# EAGLE board Qwiic_Scale-Panel (EAGLE 9.3.0)
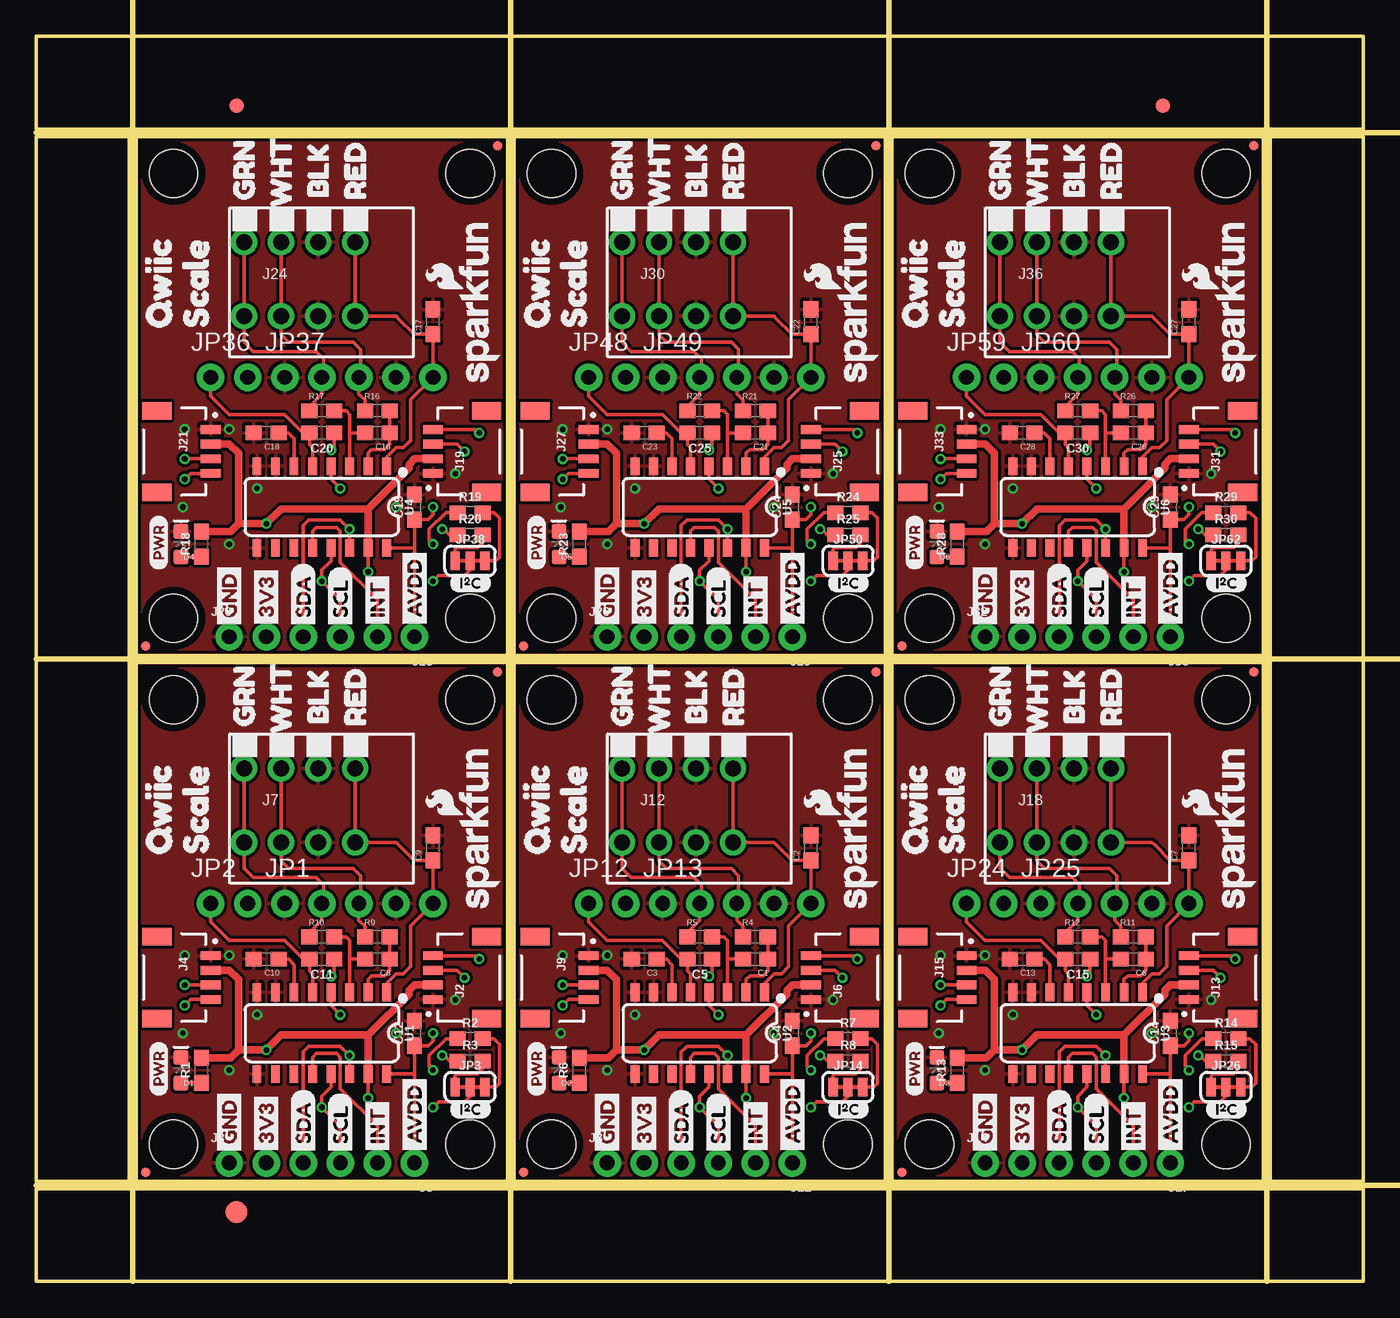
[diagram p0: board, top side]
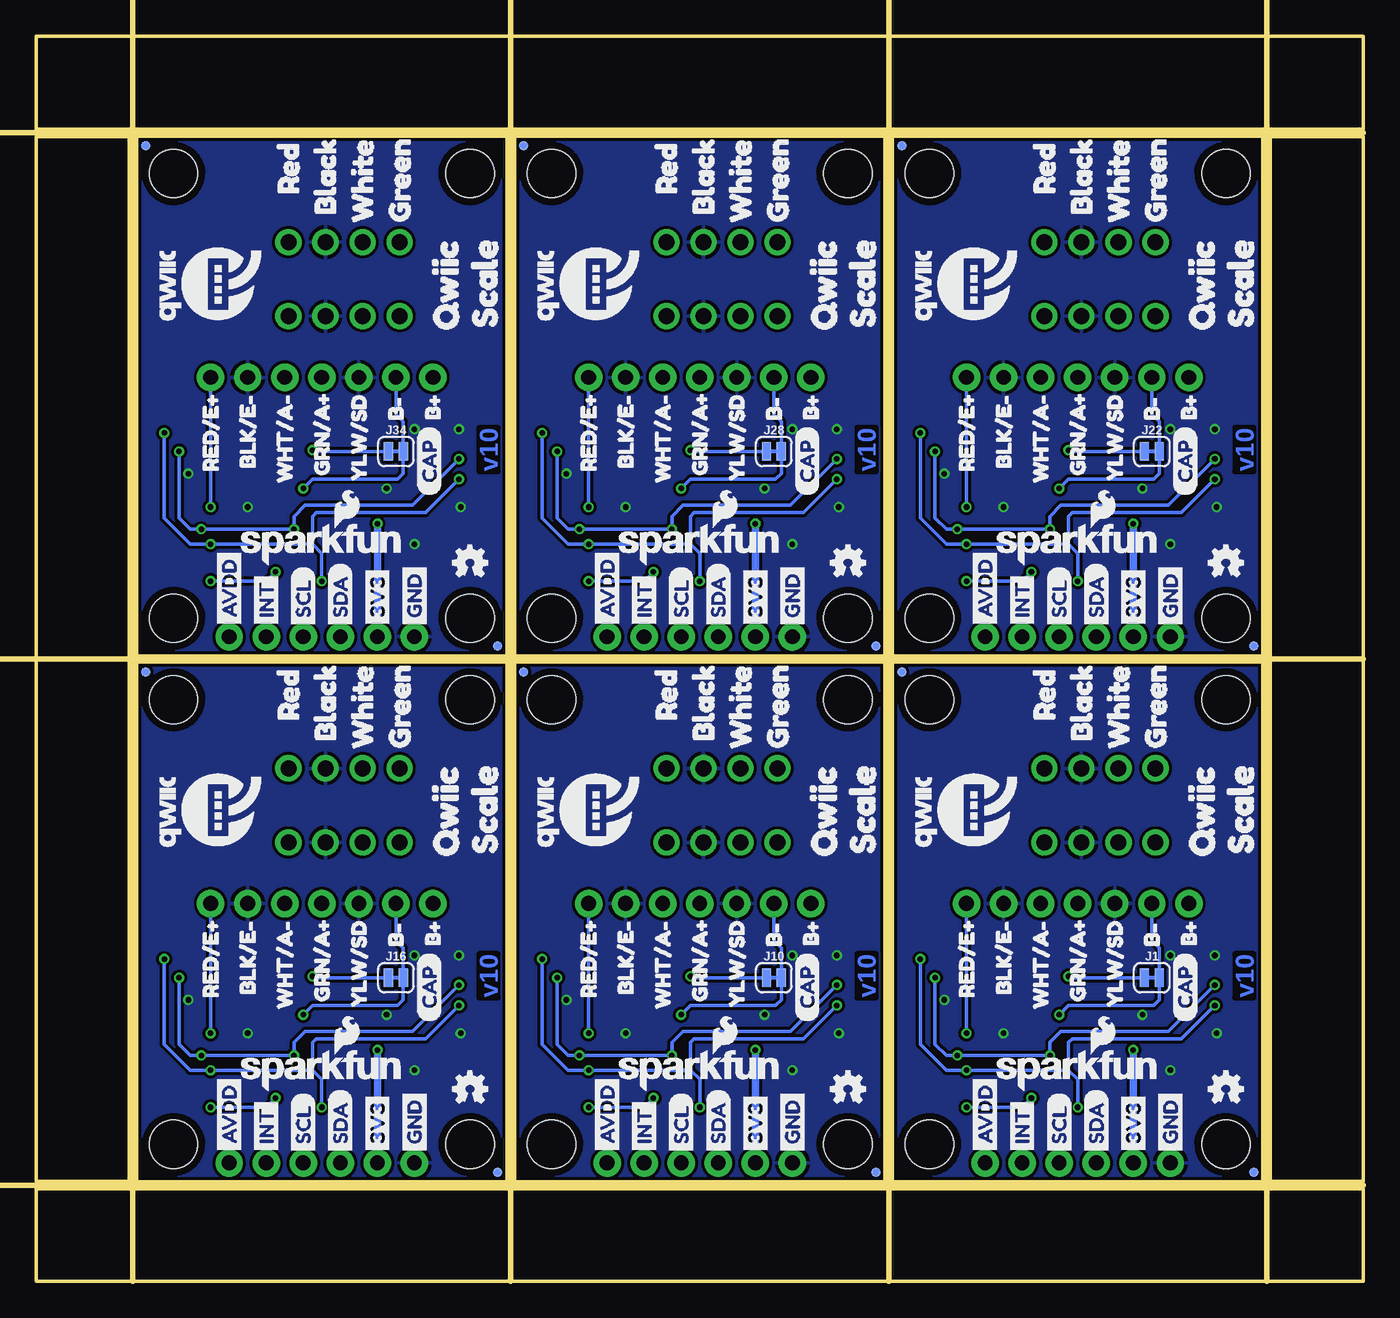
[diagram p1: board, bottom side, seen from below]

Size 90.93 x 85.34 mm. Coordinates in mm from the lower left corner, seen from the top.
Outline: 32.26,6.86 6.86,6.86 6.86,42.42 32.26,42.42 32.26,6.86
Outline: 58.17,6.86 32.77,6.86 32.77,42.42 58.17,42.42 58.17,6.86
Outline: 84.07,6.86 58.67,6.86 58.67,42.42 84.07,42.42 84.07,6.86
Outline: 32.26,42.93 6.86,42.93 6.86,78.49 32.26,78.49 32.26,42.93
Outline: 58.17,42.93 32.77,42.93 32.77,78.49 58.17,78.49 58.17,42.93
Outline: 84.07,42.93 58.67,42.93 58.67,78.49 84.07,78.49 84.07,42.93
Outline: 0,6.35 90.93,6.35 90.93,0 0,0 0,6.35
Outline: 84.58,78.49 90.93,78.49 90.93,6.86 84.58,6.86 84.58,78.49
Outline: 0,85.34 90.93,85.34 90.93,78.99 0,78.99 0,85.34
Outline: 0,78.49 6.35,78.49 6.35,6.86 0,6.86 0,78.49
Copper layers (1*16): Top 0.035mm / dielectric 1.5mm / Bottom 0.035mm
Design rules "SparkFun-2-layer-PCBWay-LIMIT": minimum track width 6mil, minimum drill 0.3mm, track to track 6mil, track to pad 6mil, pad to pad 6mil, via to via 6mil, smd to smd 6mil, copper to edge 6mil, drill to drill 6mil, minimum pad ring 6mil, minimum via ring 6mil, stop-mask expansion 4mil, vias tented up to drill 25mil, thermal gap 10mil
Net classes: 2 3.3V: width 0.508 mm
Milling: 7 lines

## Footprints (pad centres in the part's own frame; a part is rotated, then mirrored left to right if it is on the bottom)
0603 = smd 1.1 x 1: 1 -0.85,0; 2 0.85,0
LED-0603 = smd 1 x 1: A -0.877,0; C 0.877,0
FIDUCIAL-1X2 = smd 1 x 1: 1 0,0
FIDUCIAL-1.5X3 = smd 1.5 x 1.5: 1 0,0
SMT-JUMPER_2_NC_TRACE_SILK = smd 0.635 x 1.27: 1 -0.508,0; 2 0.508,0
JST04_1MM_RA = smd 0.6 x 1.35: 1 -1.5,0; 2 -0.5,0; 3 0.5,0; 4 1.5,0 | smd 1.2 x 2: NC1 2.8,-3.675; NC2 -2.8,-3.675
1X04_NO_SILK = drill 1.016 pad 1.88: 1 0,0; 2 2.54,0; 3 5.08,0; 4 7.62,0
1X02_NO_SILK = drill 1.016 pad 1.88: 1 0,0; 2 2.54,0
1X04_SPRING_TERMINAL = drill 1.1 pad 1.8: 1 7.62,2.54; 2 5.08,2.54; 3 2.54,2.54; 4 0,2.54; 5 7.62,-2.54; 6 5.08,-2.54; 7 2.54,-2.54; 8 0,-2.54
1X05_NO_SILK = drill 1.016 pad 1.88: 1 0,0; 2 2.54,0; 3 5.08,0; 4 7.62,0; 5 10.16,0
SMT-JUMPER_3_2-NC_TRACE_SILK = smd 0.635 x 1.27: 1 -1.016,0; 2 0,0; 3 1.016,0
STAND-OFF = hole 3.302: 0,0
MICRO-FIDUCIAL = smd 0.635 x 0.635: 1 0,0
SO16 = smd 0.6 x 1.2: 1 -4.445,-2.8; 2 -3.175,-2.8; 3 -1.905,-2.8; 4 -0.635,-2.8; 5 0.635,-2.8; 6 1.905,-2.8; 7 3.175,-2.8; 8 4.445,-2.8; 9 4.445,2.8; 10 3.175,2.8; 11 1.905,2.8; 12 0.635,2.8; 13 -0.635,2.8; 14 -1.905,2.8; 15 -3.175,2.8; 16 -4.445,2.8

## Placement (x,y rotation side)
C1  0.1uF  [0603]  49.28,22.1 180 top
C2  0.1uF  [0603]  53.09,29.72 90 top
C3  0.1uF  [0603]  41.66,22.1 180 top
C4  1.0uF  [0603]  51.82,17.02 90 top
C5  330pF  [0603]  45.47,22.1 180 top
C6  0.1uF  [0603]  75.18,22.1 180 top
C7  0.1uF  [0603]  78.99,29.72 90 top
C8  0.1uF  [0603]  23.37,22.1 180 top
C9  0.1uF  [0603]  27.18,29.72 90 top
C10  0.1uF  [0603]  15.75,22.1 180 top
C11  330pF  [0603]  19.56,22.1 180 top
C12  1.0uF  [0603]  25.91,17.02 90 top
C13  0.1uF  [0603]  67.56,22.1 180 top
C14  1.0uF  [0603]  77.72,17.02 90 top
C15  330pF  [0603]  71.37,22.1 180 top
C16  0.1uF  [0603]  23.37,58.17 180 top
C17  0.1uF  [0603]  27.18,65.79 90 top
C18  0.1uF  [0603]  15.75,58.17 180 top
C19  1.0uF  [0603]  25.91,53.09 90 top
C20  330pF  [0603]  19.56,58.17 180 top
C21  0.1uF  [0603]  49.28,58.17 180 top
C22  0.1uF  [0603]  53.09,65.79 90 top
C23  0.1uF  [0603]  41.66,58.17 180 top
C24  1.0uF  [0603]  51.82,53.09 90 top
C25  330pF  [0603]  45.47,58.17 180 top
C26  0.1uF  [0603]  75.18,58.17 180 top
C27  0.1uF  [0603]  78.99,65.79 90 top
C28  0.1uF  [0603]  67.56,58.17 180 top
C29  1.0uF  [0603]  77.72,53.09 90 top
C30  330pF  [0603]  71.37,58.17 180 top
D1  RED  [LED-0603]  9.91,14.48 90 top
D2  RED  [LED-0603]  35.81,14.48 90 top
D3  RED  [LED-0603]  61.72,14.48 90 top
D4  RED  [LED-0603]  9.91,50.55 90 top
D5  RED  [LED-0603]  35.81,50.55 90 top
D6  RED  [LED-0603]  61.72,50.55 90 top
E$1  [FIDUCIAL-1X2]  13.72,80.58 0 top
E$2  [FIDUCIAL-1X2]  77.22,80.58 0 top
E$3  [FIDUCIAL-1.5X3]  13.72,4.76 0 top
J1  CAP  [SMT-JUMPER_2_NC_TRACE_SILK]  14.48,20.83 0 bottom
J2  Qwiic Right Angle  [JST04_1MM_RA]  27.18,20.83 90 top
J3  PTH  [1X04_NO_SILK]  13.21,8.13 0 top
J4  Qwiic Right Angle  [JST04_1MM_RA]  11.94,20.83 270 top
J5  [1X02_NO_SILK]  25.91,8.13 180 top
J6  Qwiic Right Angle  [JST04_1MM_RA]  53.09,20.83 90 top
J7  Spring Terminal  [1X04_SPRING_TERMINAL]  14.22,32.64 0 top
J8  PTH  [1X04_NO_SILK]  39.12,8.13 0 top
J9  Qwiic Right Angle  [JST04_1MM_RA]  37.85,20.83 270 top
J10  CAP  [SMT-JUMPER_2_NC_TRACE_SILK]  40.39,20.83 0 bottom
J11  [1X02_NO_SILK]  51.82,8.13 180 top
J12  Spring Terminal  [1X04_SPRING_TERMINAL]  40.13,32.64 0 top
J13  Qwiic Right Angle  [JST04_1MM_RA]  78.99,20.83 90 top
J14  PTH  [1X04_NO_SILK]  65.02,8.13 0 top
J15  Qwiic Right Angle  [JST04_1MM_RA]  63.75,20.83 270 top
J16  CAP  [SMT-JUMPER_2_NC_TRACE_SILK]  66.29,20.83 0 bottom
J17  [1X02_NO_SILK]  77.72,8.13 180 top
J18  Spring Terminal  [1X04_SPRING_TERMINAL]  66.04,32.64 0 top
J19  Qwiic Right Angle  [JST04_1MM_RA]  27.18,56.9 90 top
J20  PTH  [1X04_NO_SILK]  13.21,44.2 0 top
J21  Qwiic Right Angle  [JST04_1MM_RA]  11.94,56.9 270 top
J22  CAP  [SMT-JUMPER_2_NC_TRACE_SILK]  14.48,56.9 0 bottom
J23  [1X02_NO_SILK]  25.91,44.2 180 top
J24  Spring Terminal  [1X04_SPRING_TERMINAL]  14.22,68.71 0 top
J25  Qwiic Right Angle  [JST04_1MM_RA]  53.09,56.9 90 top
J26  PTH  [1X04_NO_SILK]  39.12,44.2 0 top
J27  Qwiic Right Angle  [JST04_1MM_RA]  37.85,56.9 270 top
J28  CAP  [SMT-JUMPER_2_NC_TRACE_SILK]  40.39,56.9 0 bottom
J29  [1X02_NO_SILK]  51.82,44.2 180 top
J30  Spring Terminal  [1X04_SPRING_TERMINAL]  40.13,68.71 0 top
J31  Qwiic Right Angle  [JST04_1MM_RA]  78.99,56.9 90 top
J32  PTH  [1X04_NO_SILK]  65.02,44.2 0 top
J33  Qwiic Right Angle  [JST04_1MM_RA]  63.75,56.9 270 top
J34  CAP  [SMT-JUMPER_2_NC_TRACE_SILK]  66.29,56.9 0 bottom
J35  [1X02_NO_SILK]  77.72,44.2 180 top
J36  Spring Terminal  [1X04_SPRING_TERMINAL]  66.04,68.71 0 top
JP1  [1X05_NO_SILK]  17.02,25.91 0 top
JP2  [1X02_NO_SILK]  11.94,25.91 0 top
JP3  I2C  [SMT-JUMPER_3_2-NC_TRACE_SILK]  29.72,13.34 0 top
JP4  STAND-OFF  [STAND-OFF]  35.31,9.4 90 top
JP5  STAND-OFF  [STAND-OFF]  35.31,39.88 90 top
JP6  FIDUCIALUFIDUCIAL  [MICRO-FIDUCIAL]  57.53,41.78 90 top
JP7  FIDUCIALUFIDUCIAL  [MICRO-FIDUCIAL]  33.4,7.49 90 top
JP8  FIDUCIALUFIDUCIAL  [MICRO-FIDUCIAL]  57.53,41.78 270 bottom
JP9  FIDUCIALUFIDUCIAL  [MICRO-FIDUCIAL]  33.4,7.49 270 bottom
JP10  STAND-OFF  [STAND-OFF]  55.63,9.4 90 top
JP11  STAND-OFF  [STAND-OFF]  55.63,39.88 90 top
JP12  [1X02_NO_SILK]  37.85,25.91 0 top
JP13  [1X05_NO_SILK]  42.93,25.91 0 top
JP14  I2C  [SMT-JUMPER_3_2-NC_TRACE_SILK]  55.63,13.34 0 top
JP15  STAND-OFF  [STAND-OFF]  61.21,9.4 90 top
JP16  STAND-OFF  [STAND-OFF]  61.21,39.88 90 top
JP17  FIDUCIALUFIDUCIAL  [MICRO-FIDUCIAL]  83.44,41.78 90 top
JP18  FIDUCIALUFIDUCIAL  [MICRO-FIDUCIAL]  59.31,7.49 90 top
JP19  FIDUCIALUFIDUCIAL  [MICRO-FIDUCIAL]  83.44,41.78 270 bottom
JP20  FIDUCIALUFIDUCIAL  [MICRO-FIDUCIAL]  59.31,7.49 270 bottom
JP21  FIDUCIALUFIDUCIAL  [MICRO-FIDUCIAL]  31.62,41.78 90 top
JP22  STAND-OFF  [STAND-OFF]  81.53,9.4 90 top
JP23  STAND-OFF  [STAND-OFF]  81.53,39.88 90 top
JP24  [1X02_NO_SILK]  63.75,25.91 0 top
JP25  [1X05_NO_SILK]  68.83,25.91 0 top
JP26  I2C  [SMT-JUMPER_3_2-NC_TRACE_SILK]  81.53,13.34 0 top
JP27  STAND-OFF  [STAND-OFF]  9.4,45.47 90 top
JP28  STAND-OFF  [STAND-OFF]  9.4,75.95 90 top
JP29  FIDUCIALUFIDUCIAL  [MICRO-FIDUCIAL]  31.62,77.85 90 top
JP30  FIDUCIALUFIDUCIAL  [MICRO-FIDUCIAL]  7.49,43.56 90 top
JP31  STAND-OFF  [STAND-OFF]  9.4,9.4 90 top
JP32  FIDUCIALUFIDUCIAL  [MICRO-FIDUCIAL]  31.62,77.85 270 bottom
JP33  FIDUCIALUFIDUCIAL  [MICRO-FIDUCIAL]  7.49,43.56 270 bottom
JP34  STAND-OFF  [STAND-OFF]  29.72,45.47 90 top
JP35  STAND-OFF  [STAND-OFF]  29.72,75.95 90 top
JP36  [1X02_NO_SILK]  11.94,61.98 0 top
JP37  [1X05_NO_SILK]  17.02,61.98 0 top
JP38  I2C  [SMT-JUMPER_3_2-NC_TRACE_SILK]  29.72,49.4 0 top
JP39  STAND-OFF  [STAND-OFF]  35.31,45.47 90 top
JP40  STAND-OFF  [STAND-OFF]  35.31,75.95 90 top
JP41  STAND-OFF  [STAND-OFF]  9.4,39.88 90 top
JP42  FIDUCIALUFIDUCIAL  [MICRO-FIDUCIAL]  57.53,77.85 90 top
JP43  FIDUCIALUFIDUCIAL  [MICRO-FIDUCIAL]  33.4,43.56 90 top
JP44  FIDUCIALUFIDUCIAL  [MICRO-FIDUCIAL]  57.53,77.85 270 bottom
JP45  FIDUCIALUFIDUCIAL  [MICRO-FIDUCIAL]  33.4,43.56 270 bottom
JP46  STAND-OFF  [STAND-OFF]  55.63,45.47 90 top
JP47  STAND-OFF  [STAND-OFF]  55.63,75.95 90 top
JP48  [1X02_NO_SILK]  37.85,61.98 0 top
JP49  [1X05_NO_SILK]  42.93,61.98 0 top
JP50  I2C  [SMT-JUMPER_3_2-NC_TRACE_SILK]  55.63,49.4 0 top
JP51  STAND-OFF  [STAND-OFF]  61.21,45.47 90 top
JP52  STAND-OFF  [STAND-OFF]  61.21,75.95 90 top
JP53  FIDUCIALUFIDUCIAL  [MICRO-FIDUCIAL]  83.44,77.85 90 top
JP54  FIDUCIALUFIDUCIAL  [MICRO-FIDUCIAL]  59.31,43.56 90 top
JP55  FIDUCIALUFIDUCIAL  [MICRO-FIDUCIAL]  83.44,77.85 270 bottom
JP56  FIDUCIALUFIDUCIAL  [MICRO-FIDUCIAL]  59.31,43.56 270 bottom
JP57  STAND-OFF  [STAND-OFF]  81.53,45.47 90 top
JP58  STAND-OFF  [STAND-OFF]  81.53,75.95 90 top
JP59  [1X02_NO_SILK]  63.75,61.98 0 top
JP60  [1X05_NO_SILK]  68.83,61.98 0 top
JP61  FIDUCIALUFIDUCIAL  [MICRO-FIDUCIAL]  7.49,7.49 90 top
JP62  I2C  [SMT-JUMPER_3_2-NC_TRACE_SILK]  81.53,49.4 0 top
JP71  FIDUCIALUFIDUCIAL  [MICRO-FIDUCIAL]  31.62,41.78 270 bottom
JP81  FIDUCIALUFIDUCIAL  [MICRO-FIDUCIAL]  7.49,7.49 270 bottom
JP91  STAND-OFF  [STAND-OFF]  29.72,9.4 90 top
JP101  STAND-OFF  [STAND-OFF]  29.72,39.88 90 top
LOGO1  OSHW-LOGOMINI  [OSHW-LOGO-MINI]  9.4,13.21 0 bottom
LOGO2  SFE_LOGO_NAME_FLAME.1_INCH  [SFE_LOGO_NAME_FLAME_.1]  19.56,14.48 0 bottom
LOGO3  SFE_LOGO_NAME_FLAME.1_INCH  [SFE_LOGO_NAME_FLAME_.1]  30.35,31.12 90 top
LOGO4  OSHW-LOGOMINI  [OSHW-LOGO-MINI]  35.31,13.21 0 bottom
LOGO5  SFE_LOGO_NAME_FLAME.1_INCH  [SFE_LOGO_NAME_FLAME_.1]  45.47,14.48 0 bottom
LOGO6  SFE_LOGO_NAME_FLAME.1_INCH  [SFE_LOGO_NAME_FLAME_.1]  56.26,31.12 90 top
LOGO7  OSHW-LOGOMINI  [OSHW-LOGO-MINI]  61.21,13.21 0 bottom
LOGO8  SFE_LOGO_NAME_FLAME.1_INCH  [SFE_LOGO_NAME_FLAME_.1]  71.37,14.48 0 bottom
LOGO9  SFE_LOGO_NAME_FLAME.1_INCH  [SFE_LOGO_NAME_FLAME_.1]  82.17,31.12 90 top
LOGO10  OSHW-LOGOMINI  [OSHW-LOGO-MINI]  9.4,49.28 0 bottom
LOGO11  SFE_LOGO_NAME_FLAME.1_INCH  [SFE_LOGO_NAME_FLAME_.1]  19.56,50.55 0 bottom
LOGO12  SFE_LOGO_NAME_FLAME.1_INCH  [SFE_LOGO_NAME_FLAME_.1]  30.35,67.18 90 top
LOGO13  OSHW-LOGOMINI  [OSHW-LOGO-MINI]  35.31,49.28 0 bottom
LOGO14  SFE_LOGO_NAME_FLAME.1_INCH  [SFE_LOGO_NAME_FLAME_.1]  45.47,50.55 0 bottom
LOGO15  SFE_LOGO_NAME_FLAME.1_INCH  [SFE_LOGO_NAME_FLAME_.1]  56.26,67.18 90 top
LOGO16  OSHW-LOGOMINI  [OSHW-LOGO-MINI]  61.21,49.28 0 bottom
LOGO17  SFE_LOGO_NAME_FLAME.1_INCH  [SFE_LOGO_NAME_FLAME_.1]  71.37,50.55 0 bottom
LOGO18  SFE_LOGO_NAME_FLAME.1_INCH  [SFE_LOGO_NAME_FLAME_.1]  82.17,67.18 90 top
R1  1k  [0603]  11.3,14.48 90 top
R2  2.2k  [0603]  29.72,16.64 0 top
R3  2.2k  [0603]  29.72,15.11 0 top
R4  47  [0603]  49.28,23.62 0 top
R5  47  [0603]  45.47,23.62 0 top
R6  1k  [0603]  37.21,14.48 90 top
R7  2.2k  [0603]  55.63,16.64 0 top
R8  2.2k  [0603]  55.63,15.11 0 top
R9  47  [0603]  23.37,23.62 0 top
R10  47  [0603]  19.56,23.62 0 top
R11  47  [0603]  75.18,23.62 0 top
R12  47  [0603]  71.37,23.62 0 top
R13  1k  [0603]  63.12,14.48 90 top
R14  2.2k  [0603]  81.53,16.64 0 top
R15  2.2k  [0603]  81.53,15.11 0 top
R16  47  [0603]  23.37,59.69 0 top
R17  47  [0603]  19.56,59.69 0 top
R18  1k  [0603]  11.3,50.55 90 top
R19  2.2k  [0603]  29.72,52.7 0 top
R20  2.2k  [0603]  29.72,51.18 0 top
R21  47  [0603]  49.28,59.69 0 top
R22  47  [0603]  45.47,59.69 0 top
R23  1k  [0603]  37.21,50.55 90 top
R24  2.2k  [0603]  55.63,52.7 0 top
R25  2.2k  [0603]  55.63,51.18 0 top
R26  47  [0603]  75.18,59.69 0 top
R27  47  [0603]  71.37,59.69 0 top
R28  1k  [0603]  63.12,50.55 90 top
R29  2.2k  [0603]  81.53,52.7 0 top
R30  2.2k  [0603]  81.53,51.18 0 top
U1  NAU7802  [SO16]  19.56,17.02 180 top
U2  NAU7802  [SO16]  45.47,17.02 180 top
U3  NAU7802  [SO16]  71.37,17.02 180 top
U4  NAU7802  [SO16]  19.56,53.09 180 top
U5  NAU7802  [SO16]  45.47,53.09 180 top
U6  NAU7802  [SO16]  71.37,53.09 180 top
U$1  [SDA-[)]  18.29,8.51 90 top
U$2  [SDA-[)]  44.2,8.51 90 top
U$3  [SCL-[)]  20.83,8.51 90 top
U$4  [SDA-[)]  18.29,8.51 90 bottom
U$5  [SCL-[)]  20.83,8.51 90 bottom
U$6  [3V3-04]  15.75,8.51 90 top
U$7  [3V3-04]  15.75,8.51 90 bottom
U$8  [GND-04]  13.21,8.51 90 top
U$9  [GND-04]  13.21,8.51 90 bottom
U$10  [SCL-[)]  46.74,8.51 90 top
U$11  [YLW#SD4]  17.02,17.91 90 bottom
U$12  [B#11]  14.48,22.1 90 bottom
U$13  [B#12]  11.94,22.1 90 bottom
U$14  [SDA-[)]  44.2,8.51 90 bottom
U$15  [INT8]  23.37,8.51 90 top
U$16  [INT8]  23.37,8.51 90 bottom
U$17  [QWIIC2]  11.05,27.69 90 bottom
U$18  [PWR-()-03]  8.38,12.7 90 top
U$19  [I_SUPER2_C-()-03]  28.32,11.81 0 top
U$20  [CAP0]  12.19,17.78 90 bottom
U$21  [SCL-[)]  46.74,8.51 90 bottom
U$22  [QWIIC2]  8.38,27.81 90 top
U$23  [3V3-04]  41.66,8.51 90 top
U$24  [SCALE3]  10.92,27.81 90 top
U$25  [SCALE3]  8.38,27.81 90 bottom
U$26  [3V3-04]  41.66,8.51 90 bottom
U$27  [GND-04]  39.12,8.51 90 top
U$28  [GND-04]  39.12,8.51 90 bottom
U$29  [INT8]  49.28,8.51 90 top
U$30  [QWIIC-LOGO-MEDIUM]  27.18,32.26 90 bottom
U$31  [INT8]  49.28,8.51 90 bottom
U$32  [QWIIC-LOGO-MEDIUM]  53.09,32.26 90 bottom
U$33  [PWR-()-03]  34.29,12.7 90 top
U$34  [BLK#E#1]  24.64,18.8 90 bottom
U$35  [GRN#A#4]  19.56,18.29 90 bottom
U$36  [AVDD4]  25.91,8.51 90 top
U$37  [BLACK5]  19.3,35.81 90 bottom
U$38  [BLK1]  19.3,36.96 90 top
U$39  [GREEN7]  14.22,35.31 90 bottom
U$40  [GRN3]  14.22,36.83 90 top
U$41  [RED0]  21.84,36.83 90 top
U$42  [RED4]  21.84,37.21 90 bottom
U$43  [WHITE6]  16.76,35.05 90 bottom
U$44  [WHT2]  16.76,36.32 90 top
U$45  [AVDD4]  25.91,8.51 90 bottom
U$46  [RED#E#2]  27.18,18.54 90 bottom
U$47  [B#11]  40.39,22.1 90 bottom
U$48  [WHT#A#3]  22.1,17.78 90 bottom
U$49  [B#12]  37.85,22.1 90 bottom
U$50  [BLACK5]  45.21,35.81 90 bottom
U$51  [BLK1]  45.21,36.96 90 top
U$52  [GREEN7]  40.13,35.31 90 bottom
U$53  [GRN3]  40.13,36.83 90 top
U$54  [RED0]  47.75,36.83 90 top
U$55  [RED4]  47.75,37.21 90 bottom
U$56  [WHITE6]  42.67,35.05 90 bottom
U$57  [WHT2]  42.67,36.32 90 top
U$58  [BLK#E#1]  50.55,18.8 90 bottom
U$59  [GRN#A#4]  45.47,18.29 90 bottom
U$60  [RED#E#2]  53.09,18.54 90 bottom
U$61  [WHT#A#3]  48.01,17.78 90 bottom
U$62  [YLW#SD4]  42.93,17.91 90 bottom
U$63  [AVDD4]  51.82,8.51 90 top
U$64  [AVDD4]  51.82,8.51 90 bottom
U$65  [QWIIC2]  34.29,27.81 90 top
U$66  [SCALE3]  36.83,27.81 90 top
U$67  [QWIIC2]  36.96,27.69 90 bottom
U$68  [SCALE3]  34.29,27.81 90 bottom
U$69  [I_SUPER2_C-()-03]  54.23,11.81 0 top
U$70  [CAP0]  38.1,17.78 90 bottom
U$71  [SDA-[)]  70.1,8.51 90 top
U$72  [SCL-[)]  72.64,8.51 90 top
U$73  [SDA-[)]  70.1,8.51 90 bottom
U$74  [SCL-[)]  72.64,8.51 90 bottom
U$75  [3V3-04]  67.56,8.51 90 top
U$76  [3V3-04]  67.56,8.51 90 bottom
U$77  [GND-04]  65.02,8.51 90 top
U$78  [GND-04]  65.02,8.51 90 bottom
U$79  [INT8]  75.18,8.51 90 top
U$80  [INT8]  75.18,8.51 90 bottom
U$81  [QWIIC-LOGO-MEDIUM]  78.99,32.26 90 bottom
U$82  [PWR-()-03]  60.2,12.7 90 top
U$83  [B#11]  66.29,22.1 90 bottom
U$84  [B#12]  63.75,22.1 90 bottom
U$85  [BLACK5]  71.12,35.81 90 bottom
U$86  [BLK1]  71.12,36.96 90 top
U$87  [GREEN7]  66.04,35.31 90 bottom
U$88  [GRN3]  66.04,36.83 90 top
U$89  [RED0]  73.66,36.83 90 top
U$90  [RED4]  73.66,37.21 90 bottom
U$91  [WHITE6]  68.58,35.05 90 bottom
U$92  [WHT2]  68.58,36.32 90 top
U$93  [BLK#E#1]  76.45,18.8 90 bottom
U$94  [GRN#A#4]  71.37,18.29 90 bottom
U$95  [RED#E#2]  78.99,18.54 90 bottom
U$96  [WHT#A#3]  73.91,17.78 90 bottom
U$97  [YLW#SD4]  68.83,17.91 90 bottom
U$98  [AVDD4]  77.72,8.51 90 top
U$99  [AVDD4]  77.72,8.51 90 bottom
U$100  [QWIIC2]  60.2,27.81 90 top
U$101  [SCALE3]  62.74,27.81 90 top
U$102  [QWIIC2]  62.86,27.69 90 bottom
U$103  [SCALE3]  60.2,27.81 90 bottom
U$104  [I_SUPER2_C-()-03]  80.14,11.81 0 top
U$105  [CAP0]  64.01,17.78 90 bottom
U$106  [SDA-[)]  18.29,44.58 90 top
U$107  [SCL-[)]  20.83,44.58 90 top
U$108  [SDA-[)]  18.29,44.58 90 bottom
U$109  [SCL-[)]  20.83,44.58 90 bottom
U$110  [3V3-04]  15.75,44.58 90 top
U$111  [3V3-04]  15.75,44.58 90 bottom
U$112  [GND-04]  13.21,44.58 90 top
U$113  [GND-04]  13.21,44.58 90 bottom
U$114  [INT8]  23.37,44.58 90 top
U$115  [INT8]  23.37,44.58 90 bottom
U$116  [QWIIC-LOGO-MEDIUM]  27.18,68.33 90 bottom
U$117  [PWR-()-03]  8.38,48.77 90 top
U$118  [B#11]  14.48,58.17 90 bottom
U$119  [B#12]  11.94,58.17 90 bottom
U$120  [BLACK5]  19.3,71.88 90 bottom
U$121  [BLK1]  19.3,73.03 90 top
U$122  [GREEN7]  14.22,71.37 90 bottom
U$123  [GRN3]  14.22,72.9 90 top
U$124  [RED0]  21.84,72.9 90 top
U$125  [RED4]  21.84,73.28 90 bottom
U$126  [WHITE6]  16.76,71.12 90 bottom
U$127  [WHT2]  16.76,72.39 90 top
U$128  [BLK#E#1]  24.64,54.86 90 bottom
U$129  [GRN#A#4]  19.56,54.36 90 bottom
U$130  [RED#E#2]  27.18,54.61 90 bottom
U$131  [WHT#A#3]  22.1,53.85 90 bottom
U$132  [YLW#SD4]  17.02,53.97 90 bottom
U$133  [AVDD4]  25.91,44.58 90 top
U$134  [AVDD4]  25.91,44.58 90 bottom
U$135  [QWIIC2]  8.38,63.88 90 top
U$136  [SCALE3]  10.92,63.88 90 top
U$137  [QWIIC2]  11.05,63.75 90 bottom
U$138  [SCALE3]  8.38,63.88 90 bottom
U$139  [I_SUPER2_C-()-03]  28.32,47.88 0 top
U$140  [CAP0]  12.19,53.85 90 bottom
U$141  [SDA-[)]  44.2,44.58 90 top
U$142  [SCL-[)]  46.74,44.58 90 top
U$143  [SDA-[)]  44.2,44.58 90 bottom
U$144  [SCL-[)]  46.74,44.58 90 bottom
U$145  [3V3-04]  41.66,44.58 90 top
U$146  [3V3-04]  41.66,44.58 90 bottom
U$147  [GND-04]  39.12,44.58 90 top
U$148  [GND-04]  39.12,44.58 90 bottom
U$149  [INT8]  49.28,44.58 90 top
U$150  [INT8]  49.28,44.58 90 bottom
U$151  [QWIIC-LOGO-MEDIUM]  53.09,68.33 90 bottom
U$152  [PWR-()-03]  34.29,48.77 90 top
U$153  [B#11]  40.39,58.17 90 bottom
U$154  [B#12]  37.85,58.17 90 bottom
U$155  [BLACK5]  45.21,71.88 90 bottom
U$156  [BLK1]  45.21,73.03 90 top
U$157  [GREEN7]  40.13,71.37 90 bottom
U$158  [GRN3]  40.13,72.9 90 top
U$159  [RED0]  47.75,72.9 90 top
U$160  [RED4]  47.75,73.28 90 bottom
U$161  [WHITE6]  42.67,71.12 90 bottom
U$162  [WHT2]  42.67,72.39 90 top
U$163  [BLK#E#1]  50.55,54.86 90 bottom
U$164  [GRN#A#4]  45.47,54.36 90 bottom
U$165  [RED#E#2]  53.09,54.61 90 bottom
U$166  [WHT#A#3]  48.01,53.85 90 bottom
U$167  [YLW#SD4]  42.93,53.97 90 bottom
U$168  [AVDD4]  51.82,44.58 90 top
U$169  [AVDD4]  51.82,44.58 90 bottom
U$170  [QWIIC2]  34.29,63.88 90 top
U$171  [SCALE3]  36.83,63.88 90 top
U$172  [QWIIC2]  36.96,63.75 90 bottom
U$173  [SCALE3]  34.29,63.88 90 bottom
U$174  [I_SUPER2_C-()-03]  54.23,47.88 0 top
U$175  [CAP0]  38.1,53.85 90 bottom
U$176  [SDA-[)]  70.1,44.58 90 top
U$177  [SCL-[)]  72.64,44.58 90 top
U$178  [SDA-[)]  70.1,44.58 90 bottom
U$179  [SCL-[)]  72.64,44.58 90 bottom
U$180  [3V3-04]  67.56,44.58 90 top
U$181  [3V3-04]  67.56,44.58 90 bottom
U$182  [GND-04]  65.02,44.58 90 top
U$183  [GND-04]  65.02,44.58 90 bottom
U$184  [INT8]  75.18,44.58 90 top
U$185  [INT8]  75.18,44.58 90 bottom
U$186  [QWIIC-LOGO-MEDIUM]  78.99,68.33 90 bottom
U$187  [PWR-()-03]  60.2,48.77 90 top
U$188  [B#11]  66.29,58.17 90 bottom
U$189  [B#12]  63.75,58.17 90 bottom
U$190  [BLACK5]  71.12,71.88 90 bottom
U$191  [BLK1]  71.12,73.03 90 top
U$192  [GREEN7]  66.04,71.37 90 bottom
U$193  [GRN3]  66.04,72.9 90 top
U$194  [RED0]  73.66,72.9 90 top
U$195  [RED4]  73.66,73.28 90 bottom
U$196  [WHITE6]  68.58,71.12 90 bottom
U$197  [WHT2]  68.58,72.39 90 top
U$198  [BLK#E#1]  76.45,54.86 90 bottom
U$199  [GRN#A#4]  71.37,54.36 90 bottom
U$200  [RED#E#2]  78.99,54.61 90 bottom
U$201  [WHT#A#3]  73.91,53.85 90 bottom
U$202  [YLW#SD4]  68.83,53.97 90 bottom
U$203  [AVDD4]  77.72,44.58 90 top
U$204  [AVDD4]  77.72,44.58 90 bottom
U$205  [QWIIC2]  60.2,63.88 90 top
U$206  [SCALE3]  62.74,63.88 90 top
U$207  [QWIIC2]  62.86,63.75 90 bottom
U$208  [SCALE3]  60.2,63.88 90 bottom
U$209  [I_SUPER2_C-()-03]  80.14,47.88 0 top
U$210  [CAP0]  64.01,53.85 90 bottom

## Library data of the parts
C1-C3 C6-C10 C13 C16-C18 C21-C23 C26-C28 = SparkFun-Capacitors; PROD_ID: CAP-00810
C4 C12 C14 C19 C24 C29 = SparkFun-Capacitors; PROD_ID: CAP-00868
C5 C11 C15 C20 C25 C30 = SparkFun-Capacitors; PROD_ID: CAP-10108
D1-D6 = SparkFun-LED; PROD_ID: DIO-00819
E$1 E$2 LOGO1-LOGO18 = SparkFun-Aesthetics
E$3 = SparkFun-Retired
J1 J10 J16 J22 J28 J34 JP3 JP14 JP26 JP38 JP50 JP62 = SparkFun-Jumpers
J2 J4 J6 J9 J13 J15 J19 J21 J25 J27 J31 J33 = SparkFun-Connectors; PROD_ID: CONN-13694
J3 J5 J8 J11 J14 J17 J20 J23 J26 J29 J32 J35 JP1 JP2 JP12 JP13 JP24 JP25 JP36 JP37 JP48 JP49 JP59 JP60 = SparkFun-Connectors
J7 J12 J18 J24 J30 J36 = SparkFun-Connectors; SF_ID: PRT-08075
JP4-JP11 JP15-JP23 JP27-JP35 JP39-JP47 JP51-JP58 JP61 JP71 JP81 JP91 JP101 = SparkFun
R1 R6 R13 R18 R23 R28 = SparkFun-Resistors; PROD_ID: RES-07856
R2 R3 R7 R8 R14 R15 R19 R20 R24 R25 R29 R30 = SparkFun-Resistors; PROD_ID: RES-08272
R4 R5 R9-R12 R16 R17 R21 R22 R26 R27 = SparkFun-Resistors; PROD_ID: RES-14282
U1-U6 = SparkFun-IC-Conversion; PROD_ID: IC-14299
U$1-U$10 U$14 U$18 U$19 U$21 U$23 U$26-U$28 U$30 U$32 U$33 U$69 U$71-U$78 U$81 U$82 U$104 U$106-U$113 U$116 U$117 U$139 U$141-U$148 U$151 U$152 U$174 U$176-U$183 U$186 U$187 U$209 = Labels
U$11 U$62 U$97 U$132 U$167 U$202 = buzzard_labels (66)
U$12 U$13 U$47 U$49 U$83 U$84 U$118 U$119 U$153 U$154 U$188 U$189 = buzzard_labels (62)
U$15 U$16 U$29 U$31 U$79 U$80 U$114 U$115 U$149 U$150 U$184 U$185 = buzzard_labels (5)
U$17 U$22 U$24 U$25 U$65-U$68 U$100-U$103 U$135-U$138 U$170-U$173 U$205-U$208 = buzzard_labels (68)
U$20 U$70 U$105 U$140 U$175 U$210 = buzzard_labels (15)
U$34 U$35 U$46 U$48 U$58-U$61 U$93-U$96 U$128-U$131 U$163-U$166 U$198-U$201 = buzzard_labels (65)
U$36 U$45 U$63 U$64 U$98 U$99 U$133 U$134 U$168 U$169 U$203 U$204 = buzzard_labels (67)
U$37-U$44 U$50-U$57 U$85-U$92 U$120-U$127 U$155-U$162 U$190-U$197 = buzzard_labels (64)

## Nets
3.3V [3.3V]: J2.2 J3.2 J4.2 JP3.2 R1.2 U1.15
3.3V1 [3.3V]: J6.2 J8.2 J9.2 JP14.2 R6.2 U2.15
3.3V2 [3.3V]: J13.2 J14.2 J15.2 JP26.2 R13.2 U3.15
3.3V3 [3.3V]: J19.2 J20.2 J21.2 JP38.2 R18.2 U4.15
3.3V4 [3.3V]: J25.2 J26.2 J27.2 JP50.2 R23.2 U5.15
3.3V5 [3.3V]: J31.2 J32.2 J33.2 JP62.2 R28.2 U6.15
A+: J7.4 J7.8 JP1.2 R10.1
A+1: J12.4 J12.8 JP13.2 R5.1
A+2: J18.4 J18.8 JP25.2 R12.1
A+3: J24.4 J24.8 JP37.2 R17.1
A+4: J30.4 J30.8 JP49.2 R22.1
A+5: J36.4 J36.8 JP60.2 R27.1
A-: J7.3 J7.7 JP1.3 R9.1
A-1: J12.3 J12.7 JP13.3 R4.1
A-2: J18.3 J18.7 JP25.3 R11.1
A-3: J24.3 J24.7 JP37.3 R16.1
A-4: J30.3 J30.7 JP49.3 R21.1
A-5: J36.3 J36.7 JP60.3 R26.1
B+: C11.2 JP2.1 U1.5
B+1: C5.2 JP12.1 U2.5
B+2: C15.2 JP24.1 U3.5
B+3: C20.2 JP36.1 U4.5
B+4: C25.2 JP48.1 U5.5
B+5: C30.2 JP59.1 U6.5
B-: J1.2 JP2.2 U1.4
B-1: J10.2 JP12.2 U2.4
B-2: J16.2 JP24.2 U3.4
B-3: J22.2 JP36.2 U4.4
B-4: J28.2 JP48.2 U5.4
B-5: J34.2 JP59.2 U6.4
GND: C9.2 C10.2 C12.2 D1.C J2.1 J3.1 J4.1 J7.2 J7.6 JP1.1 JP1.4 U1.7 U1.8 U1.9
GND1: C2.2 C3.2 C4.2 D2.C J6.1 J8.1 J9.1 J12.2 J12.6 JP13.1 JP13.4 U2.7 U2.8 U2.9
GND2: C7.2 C13.2 C14.2 D3.C J13.1 J14.1 J15.1 J18.2 J18.6 JP25.1 JP25.4 U3.7 U3.8 U3.9
GND3: C17.2 C18.2 C19.2 D4.C J19.1 J20.1 J21.1 J24.2 J24.6 JP37.1 JP37.4 U4.7 U4.8 U4.9
GND4: C22.2 C23.2 C24.2 D5.C J25.1 J26.1 J27.1 J30.2 J30.6 JP49.1 JP49.4 U5.7 U5.8 U5.9
GND5: C27.2 C28.2 C29.2 D6.C J31.1 J32.1 J33.1 J36.2 J36.6 JP60.1 JP60.4 U6.7 U6.8 U6.9
INT: J5.2 U1.12
INT1: J11.2 U2.12
INT2: J17.2 U3.12
INT3: J23.2 U4.12
INT4: J29.2 U5.12
INT5: J35.2 U6.12
N$1: C11.1 J1.1
N$2: JP3.1 R3.2
N$3: JP3.3 R2.2
N$4: D2.A R6.1
N$5: C3.1 U2.6
N$6: C1.2 R5.2 U2.3
N$7: C1.1 R4.2 U2.2
N$8: C5.1 J10.1
N$9: JP14.1 R8.2
N$10: D1.A R1.1
N$11: C10.1 U1.6
N$12: JP14.3 R7.2
N$13: D3.A R13.1
N$14: C13.1 U3.6
N$15: C8.2 R10.2 U1.3
N$16: C8.1 R9.2 U1.2
N$17: C6.2 R12.2 U3.3
N$18: C6.1 R11.2 U3.2
N$19: C15.1 J16.1
N$20: JP26.1 R15.2
N$21: JP26.3 R14.2
N$22: D4.A R18.1
N$23: C18.1 U4.6
N$24: C16.2 R17.2 U4.3
N$25: C16.1 R16.2 U4.2
N$26: C20.1 J22.1
N$27: JP38.1 R20.2
N$28: JP38.3 R19.2
N$29: D5.A R23.1
N$30: C23.1 U5.6
N$31: C21.2 R22.2 U5.3
N$32: C21.1 R21.2 U5.2
N$33: C25.1 J28.1
N$34: JP50.1 R25.2
N$35: JP50.3 R24.2
N$36: D6.A R28.1
N$37: C28.1 U6.6
N$38: C26.2 R27.2 U6.3
N$39: C26.1 R26.2 U6.2
N$40: C30.1 J34.1
N$41: JP62.1 R30.2
N$42: JP62.3 R29.2
SCL: J2.4 J3.4 J4.4 R2.1 U1.13
SCL1: J6.4 J8.4 J9.4 R7.1 U2.13
SCL2: J13.4 J14.4 J15.4 R14.1 U3.13
SCL3: J19.4 J20.4 J21.4 R19.1 U4.13
SCL4: J25.4 J26.4 J27.4 R24.1 U5.13
SCL5: J31.4 J32.4 J33.4 R29.1 U6.13
SDA: J2.3 J3.3 J4.3 R3.1 U1.14
SDA1: J6.3 J8.3 J9.3 R8.1 U2.14
SDA2: J13.3 J14.3 J15.3 R15.1 U3.14
SDA3: J19.3 J20.3 J21.3 R20.1 U4.14
SDA4: J25.3 J26.3 J27.3 R25.1 U5.14
SDA5: J31.3 J32.3 J33.3 R30.1 U6.14
VDDA: C9.1 C12.1 J5.1 J7.1 J7.5 JP1.5 U1.1 U1.16
VDDA1: C2.1 C4.1 J11.1 J12.1 J12.5 JP13.5 U2.1 U2.16
VDDA2: C7.1 C14.1 J17.1 J18.1 J18.5 JP25.5 U3.1 U3.16
VDDA3: C17.1 C19.1 J23.1 J24.1 J24.5 JP37.5 U4.1 U4.16
VDDA4: C22.1 C24.1 J29.1 J30.1 J30.5 JP49.5 U5.1 U5.16
VDDA5: C27.1 C29.1 J35.1 J36.1 J36.5 JP60.5 U6.1 U6.16

## Tracks (layer width: path | path; a pad name or v marks a point on that pad's centre or on a via)
3.3V  (via drill 0.38)
  Top 0.254: JP3.2 29.72,12.7 29.34,12.32 27.56,12.32 v27.18,11.94 | v22.73,12.57 U1.15
  Top 0.508: 13.84,15.88 13.84,20.7 13.22,21.33 J4.2 | J2.2 25.92,20.33 25.53,19.94 25.53,19.68 22.73,16.89 | 22.73,16.89 U1.15 | 13.84,15.88 v15.75,15.88 16.76,16.89 22.73,16.89 | 13.84,15.88 13.3,15.33 R1.2
  Bottom 0.254: v27.18,11.94 23.37,11.94 v22.73,12.57
  Bottom 0.508: v15.75,15.88 J3.2
3.3V1  (via drill 0.38)
  Top 0.254: JP14.2 55.63,12.7 55.24,12.32 53.47,12.32 v53.09,11.94 | v48.64,12.57 U2.15
  Top 0.508: 39.75,15.88 39.75,20.7 39.12,21.33 J9.2 | J6.2 51.82,20.33 51.43,19.94 51.43,19.68 48.64,16.89 | 48.64,16.89 U2.15 | 39.75,15.88 v41.66,15.88 42.67,16.89 48.64,16.89 | 39.75,15.88 39.2,15.33 R6.2
  Bottom 0.254: v53.09,11.94 49.28,11.94 v48.64,12.57
  Bottom 0.508: v41.66,15.88 J8.2
3.3V2  (via drill 0.38)
  Top 0.254: JP26.2 81.53,12.7 81.15,12.32 79.38,12.32 v78.99,11.94 | v74.55,12.57 U3.15
  Top 0.508: 65.66,15.88 65.66,20.7 65.03,21.33 J15.2 | J13.2 77.73,20.33 77.34,19.94 77.34,19.68 74.55,16.89 | 74.55,16.89 U3.15 | 65.66,15.88 v67.56,15.88 68.58,16.89 74.55,16.89 | 65.66,15.88 65.11,15.33 R13.2
  Bottom 0.254: v78.99,11.94 75.18,11.94 v74.55,12.57
  Bottom 0.508: v67.56,15.88 J14.2
3.3V3  (via drill 0.38)
  Top 0.254: JP38.2 29.72,48.77 29.34,48.39 27.56,48.39 v27.18,48.01 | v22.73,48.64 U4.15
  Top 0.508: 13.84,51.94 13.84,56.77 13.22,57.4 J21.2 | J19.2 25.92,56.4 25.53,56.01 25.53,55.75 22.73,52.96 | 22.73,52.96 U4.15 | 13.84,51.94 v15.75,51.94 16.76,52.96 22.73,52.96 | 13.84,51.94 13.3,51.4 R18.2
  Bottom 0.254: v27.18,48.01 23.37,48.01 v22.73,48.64
  Bottom 0.508: v15.75,51.94 J20.2
3.3V4  (via drill 0.38)
  Top 0.254: JP50.2 55.63,48.77 55.24,48.39 53.47,48.39 v53.09,48.01 | v48.64,48.64 U5.15
  Top 0.508: 39.75,51.94 39.75,56.77 39.12,57.4 J27.2 | J25.2 51.82,56.4 51.43,56.01 51.43,55.75 48.64,52.96 | 48.64,52.96 U5.15 | 39.75,51.94 v41.66,51.94 42.67,52.96 48.64,52.96 | 39.75,51.94 39.2,51.4 R23.2
  Bottom 0.254: v53.09,48.01 49.28,48.01 v48.64,48.64
  Bottom 0.508: v41.66,51.94 J26.2
3.3V5  (via drill 0.38)
  Top 0.254: JP62.2 81.53,48.77 81.15,48.39 79.38,48.39 v78.99,48.01 | v74.55,48.64 U6.15
  Top 0.508: 65.66,51.94 65.66,56.77 65.03,57.4 J33.2 | J31.2 77.73,56.4 77.34,56.01 77.34,55.75 74.55,52.96 | 74.55,52.96 U6.15 | 65.66,51.94 v67.56,51.94 68.58,52.96 74.55,52.96 | 65.66,51.94 65.11,51.4 R28.2
  Bottom 0.254: v78.99,48.01 75.18,48.01 v74.55,48.64
  Bottom 0.508: v67.56,51.94 J32.2
A+
  Top 0.254: R10.1 18.71,23.91 19.56,24.77 JP1.2 19.68,26.04 19.68,27.18 19.18,27.69 14.86,27.69 14.22,28.32 J7.8 J7.4
A+1
  Top 0.254: R5.1 44.62,23.91 45.47,24.77 JP13.2 45.59,26.04 45.59,27.18 45.08,27.69 40.77,27.69 40.13,28.32 J12.8 J12.4
A+2
  Top 0.254: R12.1 70.52,23.91 71.37,24.77 JP25.2 71.5,26.04 71.5,27.18 70.99,27.69 66.67,27.69 66.04,28.32 J18.8 J18.4
A+3
  Top 0.254: R17.1 18.71,59.98 19.56,60.83 JP37.2 19.68,62.1 19.68,63.25 19.18,63.75 14.86,63.75 14.22,64.39 J24.8 J24.4
A+4
  Top 0.254: R22.1 44.62,59.98 45.47,60.83 JP49.2 45.59,62.1 45.59,63.25 45.08,63.75 40.77,63.75 40.13,64.39 J30.8 J30.4
A+5
  Top 0.254: R27.1 70.52,59.98 71.37,60.83 JP60.2 71.5,62.1 71.5,63.25 70.99,63.75 66.67,63.75 66.04,64.39 J36.8 J36.4
A-
  Top 0.254: R9.1 22.52,24.34 22.1,24.77 JP1.3 22.23,26.04 22.23,27.81 21.72,28.32 17.27,28.32 16.76,28.83 J7.7 J7.3
A-1
  Top 0.254: R4.1 48.43,24.34 48.01,24.77 JP13.3 48.13,26.04 48.13,27.81 47.62,28.32 43.18,28.32 42.67,28.83 J12.7 J12.3
A-2
  Top 0.254: R11.1 74.33,24.34 73.91,24.77 JP25.3 74.04,26.04 74.04,27.81 73.53,28.32 69.09,28.32 68.58,28.83 J18.7 J18.3
A-3
  Top 0.254: R16.1 22.52,60.41 22.1,60.83 JP37.3 22.23,62.1 22.23,63.88 21.72,64.39 17.27,64.39 16.76,64.9 J24.7 J24.3
A-4
  Top 0.254: R21.1 48.43,60.41 48.01,60.83 JP49.3 48.13,62.1 48.13,63.88 47.62,64.39 43.18,64.39 42.67,64.9 J30.7 J30.3
A-5
  Top 0.254: R26.1 74.33,60.41 73.91,60.83 JP60.3 74.04,62.1 74.04,63.88 73.53,64.39 69.09,64.39 68.58,64.9 J36.7 J36.3
B+
  Top 0.254: U1.5 18.92,21.08 18.71,21.3 C11.2 18.29,22.1 17.02,23.37 13.21,23.37 11.94,24.64 JP2.1
B+1
  Top 0.254: U2.5 44.83,21.08 44.62,21.3 C5.2 44.2,22.1 42.93,23.37 39.12,23.37 37.85,24.64 JP12.1
B+2
  Top 0.254: U3.5 70.74,21.08 70.52,21.3 C15.2 70.1,22.1 68.83,23.37 65.02,23.37 63.75,24.64 JP24.1
B+3
  Top 0.254: U4.5 18.92,57.15 18.71,57.36 C20.2 18.29,58.17 17.02,59.44 13.21,59.44 11.94,60.71 JP36.1
B+4
  Top 0.254: U5.5 44.83,57.15 44.62,57.36 C25.2 44.2,58.17 42.93,59.44 39.12,59.44 37.85,60.71 JP48.1
B+5
  Top 0.254: U6.5 70.74,57.15 70.52,57.36 C30.2 70.1,58.17 68.83,59.44 65.02,59.44 63.75,60.71 JP59.1
B-  (via drill 0.38)
  Top 0.254: U1.4 20.19,18.92 v20.83,18.29
  Bottom 0.254: v20.83,18.29 20.19,18.92 14.35,18.92 13.97,19.3 J1.2 13.97,22.86 14.48,23.37 JP2.2
B-1  (via drill 0.38)
  Top 0.254: U2.4 46.1,18.92 v46.74,18.29
  Bottom 0.254: v46.74,18.29 46.1,18.92 40.26,18.92 39.88,19.3 J10.2 39.88,22.86 40.39,23.37 JP12.2
B-2  (via drill 0.38)
  Top 0.254: U3.4 72.01,18.92 v72.64,18.29
  Bottom 0.254: v72.64,18.29 72.01,18.92 66.17,18.92 65.79,19.3 J16.2 65.79,22.86 66.29,23.37 JP24.2
B-3  (via drill 0.38)
  Top 0.254: U4.4 20.19,54.99 v20.83,54.36
  Bottom 0.254: v20.83,54.36 20.19,54.99 14.35,54.99 13.97,55.37 J22.2 13.97,58.93 14.48,59.44 JP36.2
B-4  (via drill 0.38)
  Top 0.254: U5.4 46.1,54.99 v46.74,54.36
  Bottom 0.254: v46.74,54.36 46.1,54.99 40.26,54.99 39.88,55.37 J28.2 39.88,58.93 40.39,59.44 JP48.2
B-5  (via drill 0.38)
  Top 0.254: U6.4 72.01,54.99 v72.64,54.36
  Bottom 0.254: v72.64,54.36 72.01,54.99 66.17,54.99 65.79,55.37 J34.2 65.79,58.93 66.29,59.44 JP59.2
GND  (via drill 0.38)
  other vias: 24.64,17.02 13.21,14.48 10.03,17.02 10.16,22.35 28.7,19.3 13.21,22.35 15.11,18.29
  pour Top (isolate 0.203, rank 4): 6.86,6.86 6.86,42.42 32.26,42.42 32.26,6.86
  pour Bottom (isolate 0.203, rank 4): 6.86,6.86 6.86,42.42 32.26,42.42 32.26,6.86
GND1  (via drill 0.38)
  other vias: 50.55,17.02 39.12,14.48 35.94,17.02 36.07,22.35 54.61,19.3 39.12,22.35 41.02,18.29
  pour Top (isolate 0.203, rank 4): 32.77,6.86 32.77,42.42 58.17,42.42 58.17,6.86
  pour Bottom (isolate 0.203, rank 4): 32.77,6.86 32.77,42.42 58.17,42.42 58.17,6.86
GND2  (via drill 0.38)
  other vias: 76.45,17.02 65.02,14.48 61.85,17.02 61.98,22.35 80.52,19.3 65.02,22.35 66.93,18.29
  pour Top (isolate 0.203, rank 4): 58.67,6.86 58.67,42.42 84.07,42.42 84.07,6.86
  pour Bottom (isolate 0.203, rank 4): 58.67,6.86 58.67,42.42 84.07,42.42 84.07,6.86
GND3  (via drill 0.38)
  other vias: 24.64,53.09 13.21,50.55 10.03,53.09 10.16,58.42 28.7,55.37 13.21,58.42 15.11,54.36
  pour Top (isolate 0.203, rank 4): 6.86,42.93 6.86,78.49 32.26,78.49 32.26,42.93
  pour Bottom (isolate 0.203, rank 4): 6.86,42.93 6.86,78.49 32.26,78.49 32.26,42.93
GND4  (via drill 0.38)
  other vias: 50.55,53.09 39.12,50.55 35.94,53.09 36.07,58.42 54.61,55.37 39.12,58.42 41.02,54.36
  pour Top (isolate 0.203, rank 4): 32.77,42.93 32.77,78.49 58.17,78.49 58.17,42.93
  pour Bottom (isolate 0.203, rank 4): 32.77,42.93 32.77,78.49 58.17,78.49 58.17,42.93
GND5  (via drill 0.38)
  other vias: 76.45,53.09 65.02,50.55 61.85,53.09 61.98,58.42 80.52,55.37 65.02,58.42 66.93,54.36
  pour Top (isolate 0.203, rank 4): 58.67,42.93 58.67,78.49 84.07,78.49 84.07,42.93
  pour Bottom (isolate 0.203, rank 4): 58.67,42.93 58.67,78.49 84.07,78.49 84.07,42.93
INT
  Top 0.254: U1.12 18.92,15.37 19.18,15.62 20.57,15.62 20.83,15.37 20.83,13.21 23.37,10.67 J5.2
INT1
  Top 0.254: U2.12 44.83,15.37 45.08,15.62 46.48,15.62 46.74,15.37 46.74,13.21 49.28,10.67 J11.2
INT2
  Top 0.254: U3.12 70.74,15.37 70.99,15.62 72.39,15.62 72.64,15.37 72.64,13.21 75.18,10.67 J17.2
INT3
  Top 0.254: U4.12 18.92,51.43 19.18,51.69 20.57,51.69 20.83,51.43 20.83,49.28 23.37,46.74 J23.2
INT4
  Top 0.254: U5.12 44.83,51.43 45.08,51.69 46.48,51.69 46.74,51.43 46.74,49.28 49.28,46.74 J29.2
INT5
  Top 0.254: U6.12 70.74,51.43 70.99,51.69 72.39,51.69 72.64,51.43 72.64,49.28 75.18,46.74 J35.2
N$1  (via drill 0.38)
  Top 0.254: C11.1 20.41,21.13 v20.19,20.91
  Bottom 0.254: v20.19,20.91 20.11,20.83 J1.1
N$2
  Top 0.254: JP3.1 28.7,14.1 28.85,14.25 30.25,14.25 30.57,14.57 R3.2
N$3
  Top 0.254: JP3.3 31.5,13.34 31.75,13.59 31.75,16.26 31.37,16.64 R2.2
N$4
  Top 0.254: D2.A 37.18,13.6 R6.1
N$5
  Top 0.254: U2.6 43.56,21.72 43.18,22.1 C3.1
N$6
  Top 0.254: U2.3 47.37,22.1 | 47.37,22.1 47.37,23.37 47.12,23.62 R5.2 | C1.2 47.37,22.1
N$7
  Top 0.254: R4.2 C1.1 50.13,21.3 49.78,20.95 48.89,20.95 48.64,20.7 U2.2
N$8  (via drill 0.38)
  Top 0.254: C5.1 46.32,21.13 v46.1,20.91
  Bottom 0.254: v46.1,20.91 46.02,20.83 J10.1
N$9
  Top 0.254: JP14.1 54.61,14.1 54.76,14.25 56.16,14.25 56.48,14.57 R8.2
N$10
  Top 0.254: D1.A 11.28,13.6 R1.1
N$11
  Top 0.254: U1.6 17.65,21.72 17.27,22.1 C10.1
N$12
  Top 0.254: JP14.3 57.4,13.34 57.66,13.59 57.66,16.26 57.28,16.64 R7.2
N$13
  Top 0.254: D3.A 63.09,13.6 R13.1
N$14
  Top 0.254: U3.6 69.47,21.72 69.09,22.1 C13.1
N$15
  Top 0.254: U1.3 21.46,22.1 | 21.46,22.1 21.46,23.37 21.21,23.62 R10.2 | C8.2 21.46,22.1
N$16
  Top 0.254: R9.2 C8.1 24.22,21.3 23.88,20.95 22.99,20.95 22.73,20.7 U1.2
N$17
  Top 0.254: U3.3 73.28,22.1 | 73.28,22.1 73.28,23.37 73.03,23.62 R12.2 | C6.2 73.28,22.1
N$18
  Top 0.254: R11.2 C6.1 76.03,21.3 75.69,20.95 74.8,20.95 74.55,20.7 U3.2
N$19  (via drill 0.38)
  Top 0.254: C15.1 72.22,21.13 v72.01,20.91
  Bottom 0.254: v72.01,20.91 71.92,20.83 J16.1
N$20
  Top 0.254: JP26.1 80.52,14.1 80.67,14.25 82.07,14.25 82.38,14.57 R15.2
N$21
  Top 0.254: JP26.3 83.31,13.34 83.57,13.59 83.57,16.26 83.19,16.64 R14.2
N$22
  Top 0.254: D4.A 11.28,49.67 R18.1
N$23
  Top 0.254: U4.6 17.65,57.78 17.27,58.17 C18.1
N$24
  Top 0.254: U4.3 21.46,58.17 | 21.46,58.17 21.46,59.44 21.21,59.69 R17.2 | C16.2 21.46,58.17
N$25
  Top 0.254: R16.2 C16.1 24.22,57.36 23.88,57.02 22.99,57.02 22.73,56.77 U4.2
N$26  (via drill 0.38)
  Top 0.254: C20.1 20.41,57.2 v20.19,56.98
  Bottom 0.254: v20.19,56.98 20.11,56.9 J22.1
N$27
  Top 0.254: JP38.1 28.7,50.16 28.85,50.32 30.25,50.32 30.57,50.63 R20.2
N$28
  Top 0.254: JP38.3 31.5,49.4 31.75,49.66 31.75,52.32 31.37,52.7 R19.2
N$29
  Top 0.254: D5.A 37.18,49.67 R23.1
N$30
  Top 0.254: U5.6 43.56,57.78 43.18,58.17 C23.1
N$31
  Top 0.254: U5.3 47.37,58.17 | 47.37,58.17 47.37,59.44 47.12,59.69 R22.2 | C21.2 47.37,58.17
N$32
  Top 0.254: R21.2 C21.1 50.13,57.36 49.78,57.02 48.89,57.02 48.64,56.77 U5.2
N$33  (via drill 0.38)
  Top 0.254: C25.1 46.32,57.2 v46.1,56.98
  Bottom 0.254: v46.1,56.98 46.02,56.9 J28.1
N$34
  Top 0.254: JP50.1 54.61,50.16 54.76,50.32 56.16,50.32 56.48,50.63 R25.2
N$35
  Top 0.254: JP50.3 57.4,49.4 57.66,49.66 57.66,52.32 57.28,52.7 R24.2
N$36
  Top 0.254: D6.A 63.09,49.67 R28.1
N$37
  Top 0.254: U6.6 69.47,57.78 69.09,58.17 C28.1
N$38
  Top 0.254: U6.3 73.28,58.17 | 73.28,58.17 73.28,59.44 73.03,59.69 R27.2 | C26.2 73.28,58.17
N$39
  Top 0.254: R26.2 C26.1 76.03,57.36 75.69,57.02 74.8,57.02 74.55,56.77 U6.2
N$40  (via drill 0.38)
  Top 0.254: C30.1 72.22,57.2 v72.01,56.98
  Bottom 0.254: v72.01,56.98 71.92,56.9 J34.1
N$41
  Top 0.254: JP62.1 80.52,50.16 80.67,50.32 82.07,50.32 82.38,50.63 R30.2
N$42
  Top 0.254: JP62.3 83.31,49.4 83.57,49.66 83.57,52.32 83.19,52.7 R29.2
SCL  (via drill 0.38)
  Top 0.254: U1.13 20.19,13.33 19.56,12.69 v19.56,11.94 20.83,10.67 J3.4 | J2.4 30.12,22.33 v30.35,22.1 | J4.4 10.56,19.33 v10.16,18.92 | R2.1 28.07,16.64 26.92,15.49 26.92,14.73 v27.18,14.48
  Bottom 0.254: v30.35,22.1 30.35,16.26 28.57,14.48 v27.18,14.48 20.19,14.48 | v10.16,18.92 12.45,16.64 19.94,16.64 20.19,16.38 20.19,14.48 | 20.19,14.48 19.56,13.84 v19.56,11.94
SCL1  (via drill 0.38)
  Top 0.254: U2.13 46.1,13.33 45.47,12.69 v45.47,11.94 46.74,10.67 J8.4 | J6.4 56.03,22.33 v56.26,22.1 | J9.4 36.47,19.33 v36.07,18.92 | R7.1 53.97,16.64 52.83,15.49 52.83,14.73 v53.09,14.48
  Bottom 0.254: v56.26,22.1 56.26,16.26 54.48,14.48 v53.09,14.48 46.1,14.48 | v36.07,18.92 38.35,16.64 45.85,16.64 46.1,16.38 46.1,14.48 | 46.1,14.48 45.47,13.84 v45.47,11.94
SCL2  (via drill 0.38)
  Top 0.254: U3.13 72.01,13.33 71.37,12.69 v71.37,11.94 72.64,10.67 J14.4 | J13.4 81.94,22.33 v82.17,22.1 | J15.4 62.38,19.33 v61.98,18.92 | R14.1 79.88,16.64 78.74,15.49 78.74,14.73 v78.99,14.48
  Bottom 0.254: v82.17,22.1 82.17,16.26 80.39,14.48 v78.99,14.48 72.01,14.48 | v61.98,18.92 64.26,16.64 71.76,16.64 72.01,16.38 72.01,14.48 | 72.01,14.48 71.37,13.84 v71.37,11.94
SCL3  (via drill 0.38)
  Top 0.254: U4.13 20.19,49.4 19.56,48.76 v19.56,48.01 20.83,46.74 J20.4 | J19.4 30.12,58.4 v30.35,58.17 | J21.4 10.56,55.4 v10.16,54.99 | R19.1 28.07,52.7 26.92,51.56 26.92,50.8 v27.18,50.55
  Bottom 0.254: v30.35,58.17 30.35,52.32 28.57,50.55 v27.18,50.55 20.19,50.55 | v10.16,54.99 12.45,52.7 19.94,52.7 20.19,52.45 20.19,50.55 | 20.19,50.55 19.56,49.91 v19.56,48.01
SCL4  (via drill 0.38)
  Top 0.254: U5.13 46.1,49.4 45.47,48.76 v45.47,48.01 46.74,46.74 J26.4 | J25.4 56.03,58.4 v56.26,58.17 | J27.4 36.47,55.4 v36.07,54.99 | R24.1 53.97,52.7 52.83,51.56 52.83,50.8 v53.09,50.55
  Bottom 0.254: v56.26,58.17 56.26,52.32 54.48,50.55 v53.09,50.55 46.1,50.55 | v36.07,54.99 38.35,52.7 45.85,52.7 46.1,52.45 46.1,50.55 | 46.1,50.55 45.47,49.91 v45.47,48.01
SCL5  (via drill 0.38)
  Top 0.254: U6.13 72.01,49.4 71.37,48.76 v71.37,48.01 72.64,46.74 J32.4 | J31.4 81.94,58.4 v82.17,58.17 | J33.4 62.38,55.4 v61.98,54.99 | R29.1 79.88,52.7 78.74,51.56 78.74,50.8 v78.99,50.55
  Bottom 0.254: v82.17,58.17 82.17,52.32 80.39,50.55 v78.99,50.55 72.01,50.55 | v61.98,54.99 64.26,52.7 71.76,52.7 72.01,52.45 72.01,50.55 | 72.01,50.55 71.37,49.91 v71.37,48.01
SDA  (via drill 0.38)
  Top 0.254: U1.14 v21.46,15.49 20.83,16.13 18.67,16.13 18.29,15.75 J3.3 | J2.3 28.84,21.33 v29.34,20.83 | J4.3 v10.17,20.33 v10.16,20.32 | R3.1 28.32,15.11 27.94,15.49 v27.81,15.49
  Bottom 0.254: v29.34,20.83 29.34,16.26 28.57,15.49 v27.81,15.49 v21.46,15.49 21.46,16.38 20.7,17.14 13.34,17.14 v10.16,20.32
SDA1  (via drill 0.38)
  Top 0.254: U2.14 v47.37,15.49 46.74,16.13 44.58,16.13 44.2,15.75 J8.3 | J6.3 54.74,21.33 v55.24,20.83 | J9.3 v36.08,20.33 v36.07,20.32 | R8.1 54.23,15.11 53.85,15.49 v53.72,15.49
  Bottom 0.254: v55.24,20.83 55.24,16.26 54.48,15.49 v53.72,15.49 v47.37,15.49 47.37,16.38 46.61,17.14 39.24,17.14 v36.07,20.32
SDA2  (via drill 0.38)
  Top 0.254: U3.14 v73.28,15.49 72.64,16.13 70.48,16.13 70.1,15.75 J14.3 | J13.3 80.65,21.33 v81.15,20.83 | J15.3 v61.98,20.33 v61.98,20.32 | R15.1 80.14,15.11 79.76,15.49 v79.63,15.49
  Bottom 0.254: v81.15,20.83 81.15,16.26 80.39,15.49 v79.63,15.49 v73.28,15.49 73.28,16.38 72.52,17.14 65.15,17.14 v61.98,20.32
SDA3  (via drill 0.38)
  Top 0.254: U4.14 v21.46,51.56 20.83,52.2 18.67,52.2 18.29,51.82 J20.3 | J19.3 28.84,57.4 v29.34,56.9 | J21.3 v10.17,56.4 v10.16,56.39 | R20.1 28.32,51.18 27.94,51.56 v27.81,51.56
  Bottom 0.254: v29.34,56.9 29.34,52.32 28.57,51.56 v27.81,51.56 v21.46,51.56 21.46,52.45 20.7,53.21 13.34,53.21 v10.16,56.39
SDA4  (via drill 0.38)
  Top 0.254: U5.14 v47.37,51.56 46.74,52.2 44.58,52.2 44.2,51.82 J26.3 | J25.3 54.74,57.4 v55.24,56.9 | J27.3 v36.08,56.4 v36.07,56.39 | R25.1 54.23,51.18 53.85,51.56 v53.72,51.56
  Bottom 0.254: v55.24,56.9 55.24,52.32 54.48,51.56 v53.72,51.56 v47.37,51.56 47.37,52.45 46.61,53.21 39.24,53.21 v36.07,56.39
SDA5  (via drill 0.38)
  Top 0.254: U6.14 v73.28,51.56 72.64,52.2 70.48,52.2 70.1,51.82 J32.3 | J31.3 80.65,57.4 v81.15,56.9 | J33.3 v61.98,56.4 v61.98,56.39 | R30.1 80.14,51.18 79.76,51.56 v79.63,51.56
  Bottom 0.254: v81.15,56.9 81.15,52.32 80.39,51.56 v79.63,51.56 v73.28,51.56 73.28,52.45 72.52,53.21 65.15,53.21 v61.98,56.39
VDDA  (via drill 0.38)
  Top 0.254: U1.16 24.64,14.22 25.91,14.22 | U1.1 24,20.45 24.64,21.08 25.15,21.08 25.65,21.59 25.65,24.38 JP1.5 C9.1 25.87,28.87 24.83,29.91 24.64,30.1 J7.5 J7.1 | J5.1 25.91,14.22 | 25.91,14.22 C12.1 26.84,16.17 27.18,16.51 v27.18,17.02
  Bottom 0.254: v27.18,17.02 JP1.5
VDDA1  (via drill 0.38)
  Top 0.254: U2.16 50.55,14.22 51.82,14.22 | U2.1 49.91,20.45 50.55,21.08 51.05,21.08 51.56,21.59 51.56,24.38 JP13.5 C2.1 51.78,28.87 50.74,29.91 50.55,30.1 J12.5 J12.1 | J11.1 51.82,14.22 | 51.82,14.22 C4.1 52.74,16.17 53.09,16.51 v53.09,17.02
  Bottom 0.254: v53.09,17.02 JP13.5
VDDA2  (via drill 0.38)
  Top 0.254: U3.16 76.45,14.22 76.46,14.22 77.72,14.22 | U3.1 75.82,20.45 76.45,21.08 76.96,21.08 77.47,21.59 77.47,24.38 JP25.5 C7.1 77.69,28.87 76.65,29.91 76.45,30.1 J18.5 J18.1 | J17.1 77.72,14.22 | 77.72,14.22 C14.1 78.65,16.17 78.99,16.51 v78.99,17.02
  Bottom 0.254: v78.99,17.02 JP25.5
VDDA3  (via drill 0.38)
  Top 0.254: U4.16 24.64,50.29 25.91,50.29 | U4.1 24,56.51 24.64,57.15 25.15,57.15 25.65,57.66 25.65,60.45 JP37.5 C17.1 25.87,64.94 24.83,65.98 24.64,66.17 J24.5 J24.1 | J23.1 25.91,50.29 | 25.91,50.29 C19.1 26.84,52.24 27.18,52.58 v27.18,53.09
  Bottom 0.254: v27.18,53.09 JP37.5
VDDA4  (via drill 0.38)
  Top 0.254: U5.16 50.55,50.29 51.82,50.29 | U5.1 49.91,56.51 50.55,57.15 51.05,57.15 51.56,57.66 51.56,60.45 JP49.5 C22.1 51.78,64.94 50.74,65.98 50.55,66.17 J30.5 J30.1 | J29.1 51.82,50.29 | 51.82,50.29 C24.1 52.74,52.24 53.09,52.58 v53.09,53.09
  Bottom 0.254: v53.09,53.09 JP49.5
VDDA5  (via drill 0.38)
  Top 0.254: U6.16 76.45,50.29 76.46,50.29 77.72,50.29 | U6.1 75.82,56.51 76.45,57.15 76.96,57.15 77.47,57.66 77.47,60.45 JP60.5 C27.1 77.69,64.94 76.65,65.98 76.45,66.17 J36.5 J36.1 | J35.1 77.72,50.29 | 77.72,50.29 C29.1 78.65,52.24 78.99,52.58 v78.99,53.09
  Bottom 0.254: v78.99,53.09 JP60.5

## Text on the board
Bottom: v10 | v10 | v10 | v10 | v10 | v10
Milling: v-score | v-score | v-score | v-score | v-score | v-score | v-score